# Altium PCB A5.PcbDoc
Units mm, origin at the board's own origin, x right, y up, seen from the top; angles counter-clockwise.
Board outline 80 x 75 mm, 2 copper layers (Top Layer, Bottom Layer); 17 components, 31 nets, 133 pads, 6 vias.
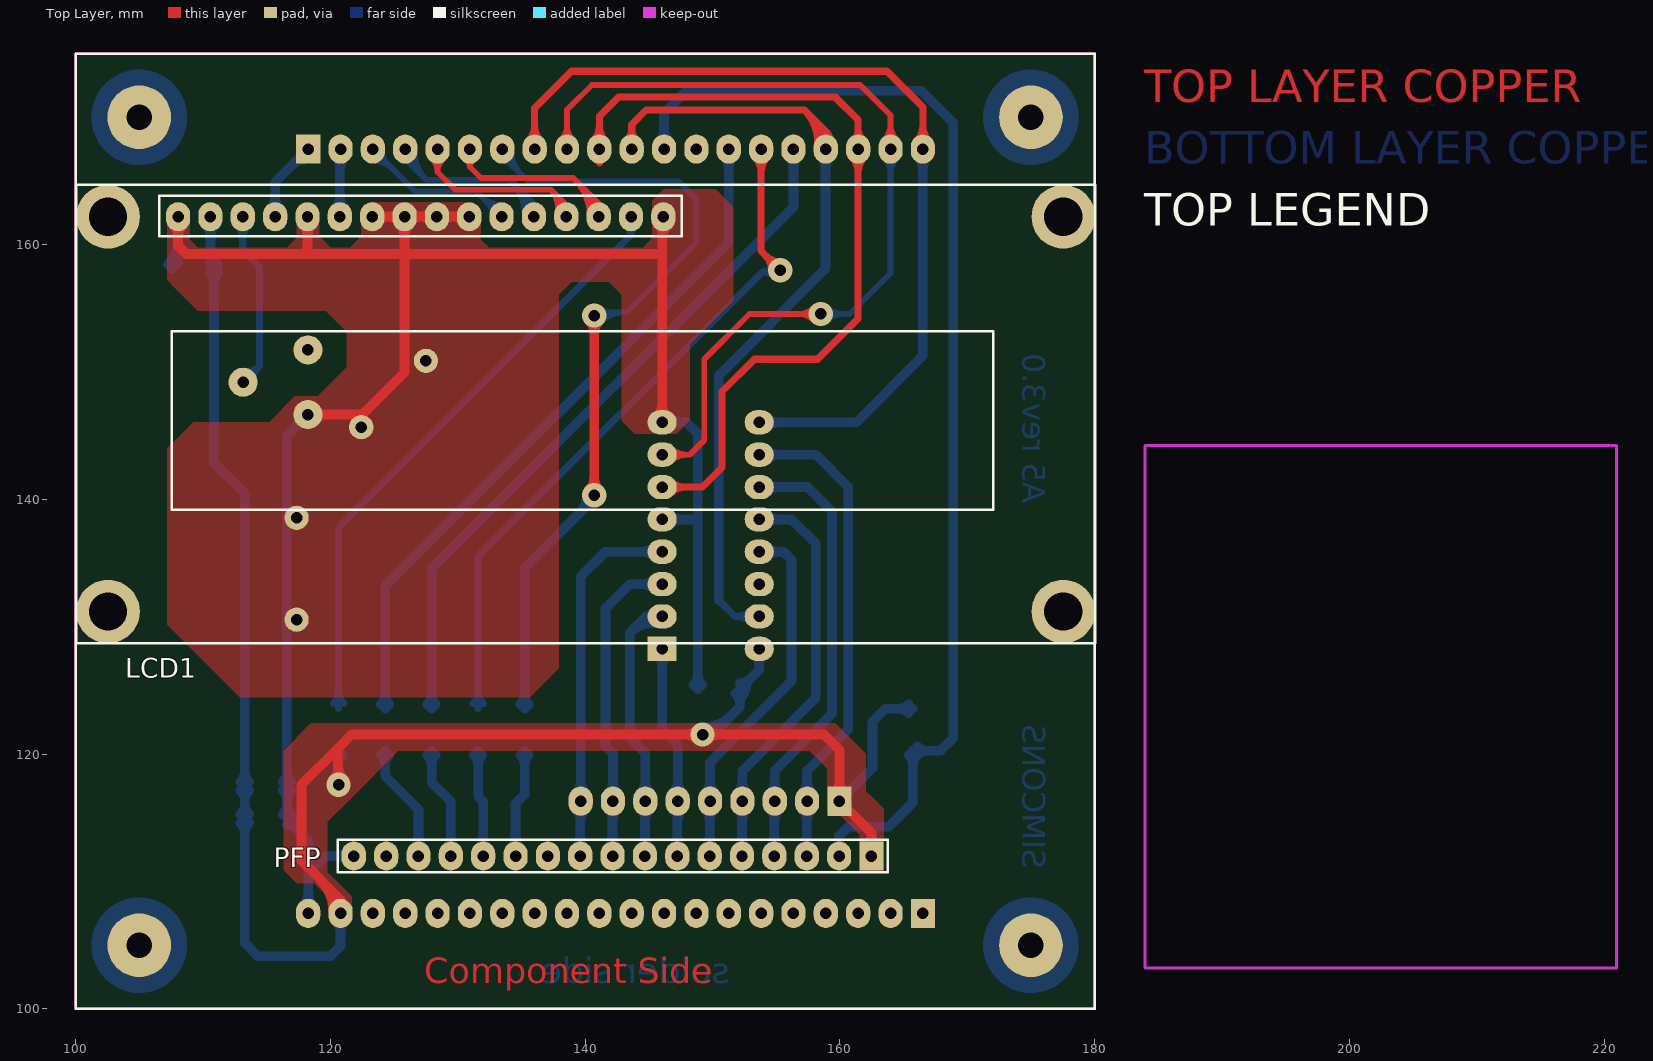
[diagram p0: Top Layer view]
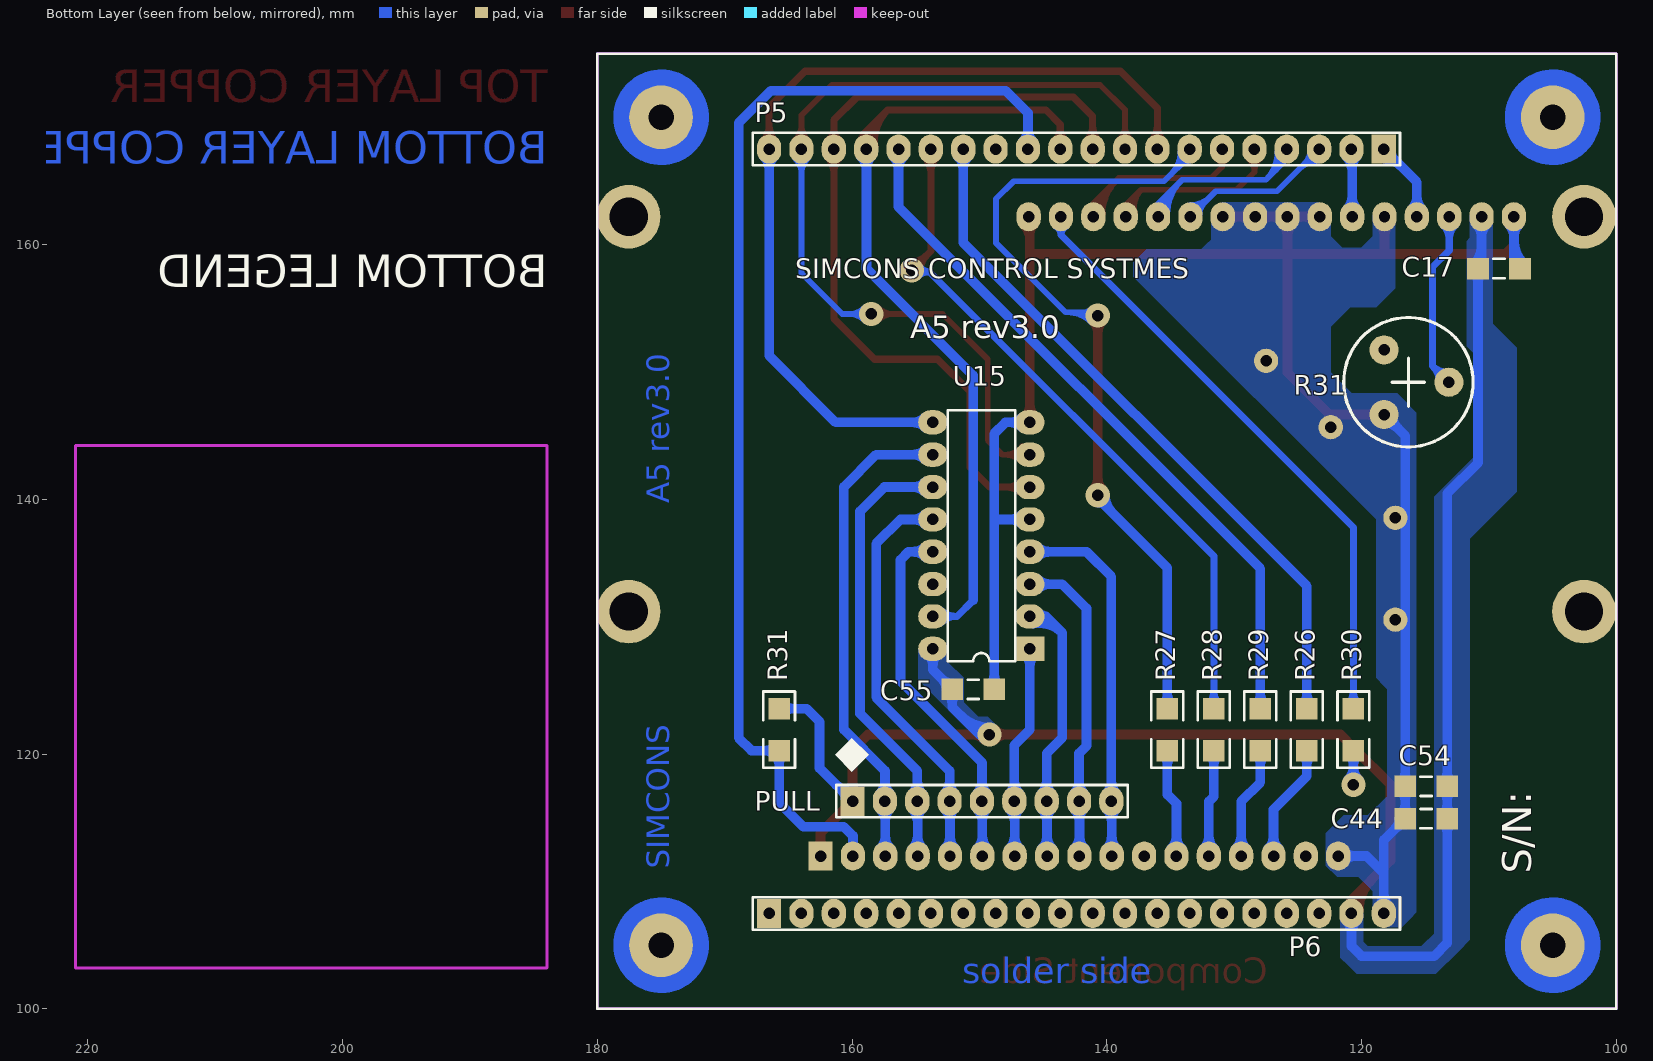
[diagram p1: Bottom Layer view, seen from below]
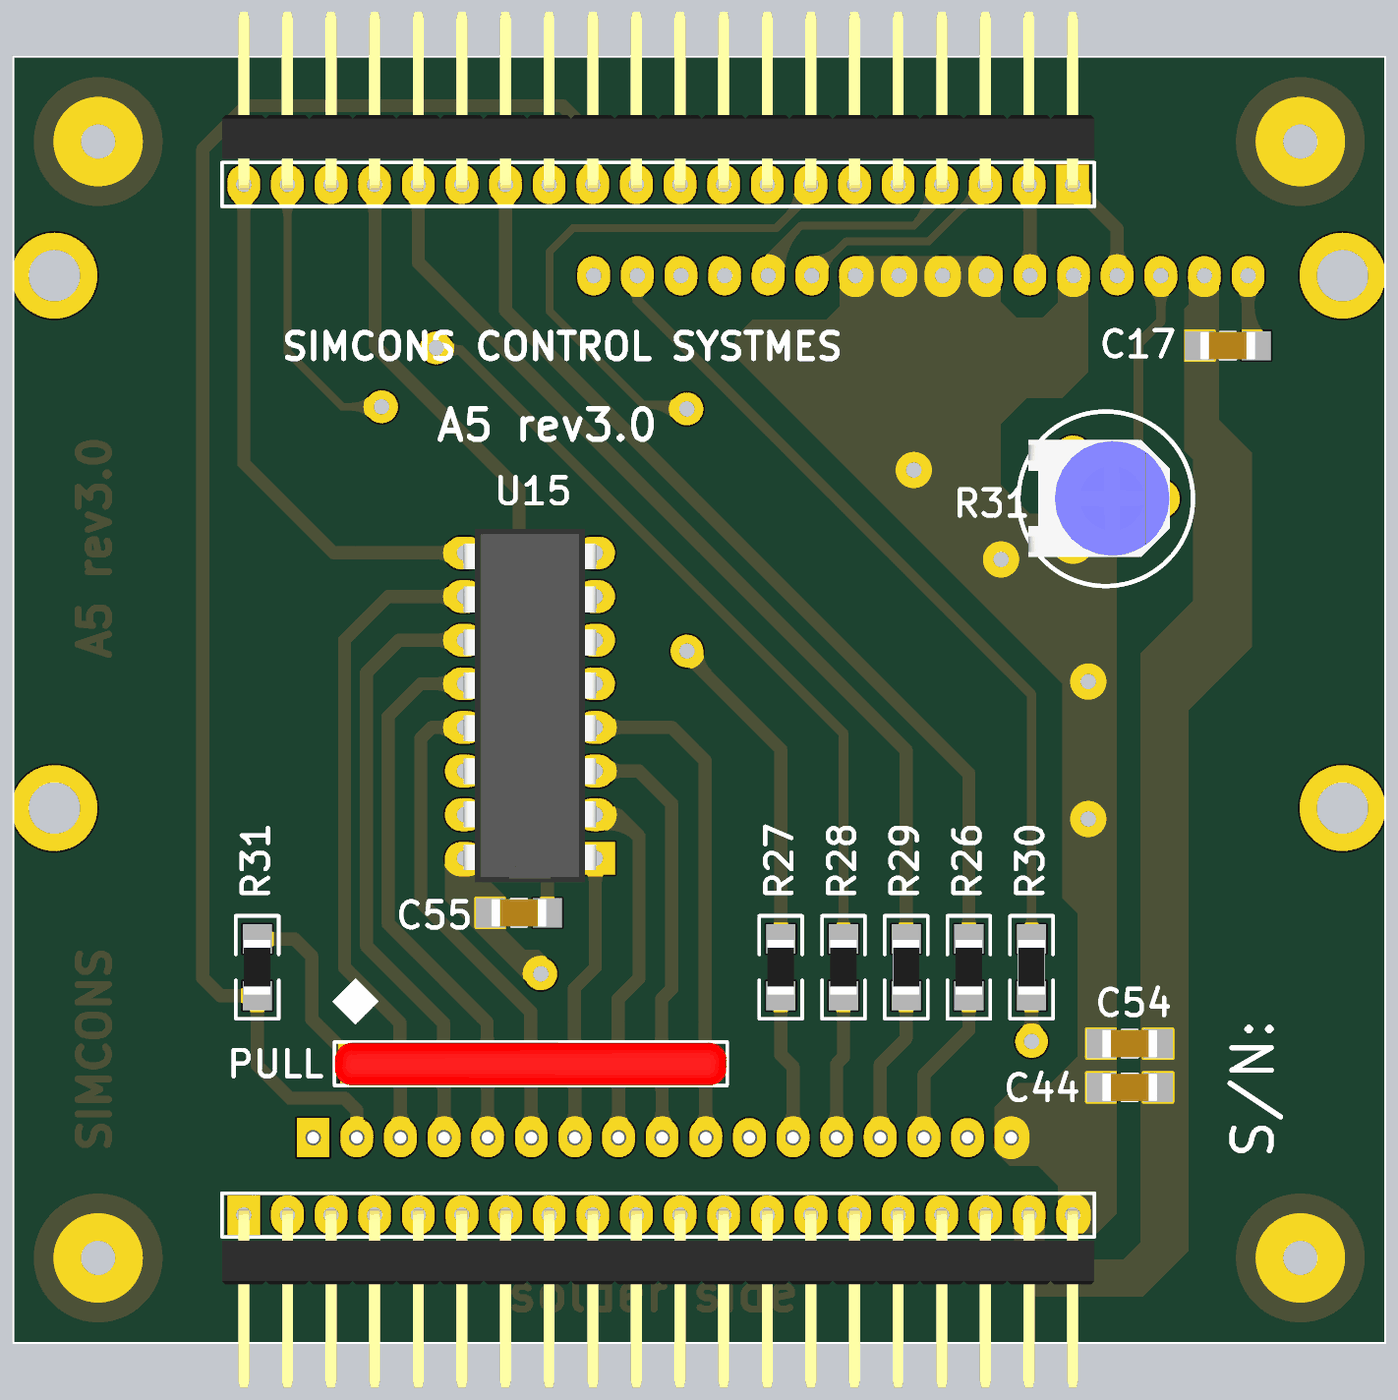
[diagram p2: 3D render of the assembled board from below, using the file's embedded part models]

## Layer stack, top to bottom
Top Layer: signal copper 0.0356
Dielectric: dielectric 0.32, FR-4, Dk 4.8
Bottom Layer: signal copper 0.0356

## Board outline
100,100 180,100 180,175 100,175

## Design rules (kind name [scope] priority, off if disabled: settings)
Clearance [All] p1: gap=0.457
PolygonConnect [All] p1: connectstyle=Direct reliefconductorwidth=0.254 reliefentries=4 polygonreliefangle="90 Angle"
RoutingVias [All] p1: holewidth=0.711 width=1.905 viastyle="Through Hole" minholewidth=0.711 minwidth=1.905 maxholewidth=1.524 maxwidth=1.905
SilkToSilkClearance [All] p1: silktosilkclearance=0
SilkscreenOverComponentPads [All] p1: minsilkscreentomaskgap=0
SolderMaskExpansion [All] p1: expansion=0.102
Width POWER [(InNet('VCC') OR InNet('VCC1') OR InNet('GND'))] p1: maxlimit=0.914 minlimit=0.66 preferedwidth=0.762
Width [All] p2: maxlimit=0.762 minlimit=0.457 preferedwidth=0.559
26 further rules are at their usual default settings.

## Classes and differential pairs
component class SWITCHES: PFP PULL U15
component class KEYBOARD: C17 C44 C54 C55 LCD1 P5 P6 R26 R27 R28 R29 R30 R31

## Components (designator, comment, footprint, x,y, rotation, side; value= is the part's Value field where it differs from the comment)
C17 ".1uF 1206" C1206 109.22,158.115 r0 bottom
C44 ".1uF 1206" C1206 114.935,114.935 r180 bottom
C54 "1uF 1206" C1206 114.935,117.475 r180 bottom
C55 ".1uF 1206" C1206 150.495,125.095 r0 bottom
LCD1 "JHD 162A" 162A 108.046,162.191 r0 top locked
P5 "Header 20" HDR1X20_BURGE_M 118.26,167.5 r0 bottom locked
P6 "Header 20" HDR1X20_BURGE_M 166.52,107.5 r180 bottom locked
PFP "MHDR1X17" HDR1X17_BURGE_F 162.48,112 r180 top locked
PULL "10K RESISTOR NETWORK 8+1PIN" RESPACK8+1 159.969,116.307 r180 bottom
R26 "470E 1206" R1206 120.65,121.92 r270 bottom
R27 "470E 1206" R1206 135.255,121.92 r270 bottom
R28 "470E 1206" R1206 131.604,121.92 r270 bottom
R29 "470E 1206" R1206 127.952,121.92 r270 bottom
R30 "470E 1206" R1206 124.301,121.92 r270 bottom
R31 "470E 1206" R1206 165.735,121.92 r270 bottom
R31 "PRESET 5K" POT 118.237,149.2 r90 bottom
U15 "SN74HC148N" N016D 149.86,137.16 r90 bottom

## Footprints (in the part's own frame and the unit in brackets; to place one, negate y for a bottom-side part, rotate by r counter-clockwise, add the part's x,y. Pads: shape width x height; smd on the part's side, far side on the other; paste and mask are expansions set on the pad)
162A [mm]
  oval 1.905x2.286 hole 0.9: 1(0,0) 2(2.54,0) 3(5.08,0) 4(7.62,0) 5(10.16,0) 6(12.7,0) 7(15.24,0) 8(17.78,0) 9(20.32,0) 10(22.86,0) 11(25.4,0) 12(27.94,0) 13(30.48,0) 14(33.02,0) 15(35.56,0) 16(38.1,0)
  round 5 hole 3: M1(-5.5,0) M2(69.5,0) M3(-5.5,-31) M4(69.5,-31)
  silkscreen extent -8,-33.5 72,2.5, body extent -8.01,-33.5 72,2.5, height 10.16
C1206 [mm] "Chip Capacitor, Body 3.2x1.6mm, IPC High Density"
  rect 1.7x1.7 smd: 1(-1.65,0) 2(1.65,0)
  silkscreen extent -0.44,-0.76 0.44,0.76, body extent -1.6,-0.8 1.6,0.8, height 1
HDR1X17_BURGE_F [mm] "Connector; Header; 17 Position"
  rect 1.905x2.286 hole 0.9: 1(0,0)
  oval 1.905x2.286 hole 0.9: 2(2.54,0) 3(5.08,0) 4(7.62,0) 5(10.16,0) 6(12.7,0) 7(15.24,0) 8(17.78,0) 9(20.32,0) 10(22.86,0) 11(25.4,0) 12(27.94,0) 13(30.48,0) 14(33.02,0) 15(35.56,0) 16(38.1,0) 17(40.64,0)
  silkscreen extent -1.27,-1.27 41.91,1.27, body extent -1.27,-1.27 41.91,1.27, height 6.02
HDR1X20_BURGE_M [mil] "Connector; Header; 20 Position"
  rect 75x90 hole 35.43: 1(0,0)
  oval 75x90 hole 35.43: 2(100,0) 3(200,0) 4(300,0) 5(400,0) 6(500,0) 7(600,0) 8(700,0) 9(800,0) 10(900,0) 11(1000,0) 12(1100,0) 13(1200,0) 14(1300,0) 15(1400,0) 16(1500,0) 17(1600,0) 18(1700,0) 19(1800,0) 20(1900,0)
  silkscreen extent -50,-50 1950,50, body extent -50,-395 1950,13, height 100
N016D [mm] "DIP; 16 Leads; Row Spacing 7.62 mm; Pitch 2.54 mm"
  rect 1.905x2.286 hole 0.9: 1(-8.89,-3.81)
  oval 1.905x2.286 hole 0.9: 2(-6.35,-3.81) 3(-3.81,-3.81) 4(-1.27,-3.81) 5(1.27,-3.81) 6(3.81,-3.81) 7(6.35,-3.81) 8(8.89,-3.81) 9(8.89,3.81) 10(6.35,3.81) 11(3.81,3.81) 12(1.27,3.81) 13(-1.27,3.81) 14(-3.81,3.81) 15(-6.35,3.81) 16(-8.89,3.81)
  silkscreen extent -9.85,-2.65 9.85,2.65, body extent -10.3,-3.88 10.3,3.88, height 4.5
POT [mil] "pot"
  round 90 hole 35.43: 1(-100,0) 2(0,-200) 3(100,0)
  silkscreen extent -200,-275 200,125, body extent -133,-222 135,102, height 300
R1206 [mm] "Chip Capacitor, Body 3.2x1.6mm, IPC High Density"
  rect 1.7x1.7 smd: 1(-1.65,0) 2(1.65,0)
  silkscreen extent -3,-1.25 3,1.25, body extent -1.59,-0.77 1.59,0.77, height 0.63
RESPACK8+1 [mm] "Connector; Header; 9 Position"
  rect 1.905x2.286 hole 0.9: 1(0,0)
  oval 1.905x2.286 hole 0.9: 2(2.54,0) 3(5.08,0) 4(7.62,0) 5(10.16,0) 6(12.7,0) 7(15.24,0) 8(17.78,0) 9(20.32,0)
  silkscreen extent -1.27,-1.27 21.59,1.27, body extent -1.25,-1.27 21.56,1.23, height 5.93

## Part data
C17 C44 C54 C55: library part Cap, "Capacitor"
LCD1: library part 162A, "16 char * 2 line LCD character display with b/light"
P5 P6: "Header, 20-Pin"
PFP: "Header, 17-Pin"
PULL: library part "Header 9", "Header, 9-Pin"
R26 R27 R28 R29 R30 R31: library part Res1, "Resistor"
R31: library part "Res Adj1", "Variable Resistor"
U15: "8-Line to 3-Line Priority Encoder"

## Free pads (board coordinates)
  round 5 hole 2: 0(105,170) 1(175,170) 2(175,105) 3(105,105)
  round 1.905 hole 0.9: 0(117.348,130.556) 1(117.348,138.557) 2(122.428,145.669) 3(127.508,150.876)

## Via types
v1: diameter 1.905, hole 0.9, Top Layer to Bottom Layer, 6 vias

## Nets (pads, with @x,y where several pads share a name; then routed paths per layer and width w, separated by ;. In a path a pad name is that pad's centre, name@x,y a point inside that pad or via, vN(x,y) a via of type N, cw(c..) or ccw(c..) an arc to the next point about the centre after c; other vN are vias at no path point)
AUTO: P5.8 P5.20 U15.9 | length 80
  Top Layer w0.559: P5.8@135.564,168.166 ccw(c134.415,169.316) 136.04,169.316 ccw(c137.665,169.316) P5.8@136.516,168.166 ; P5.8 136.04,170.711 138.938,173.609 163.703,173.609 166.52,170.792 P5.20 ; P5.20@166.044,168.166 ccw(c164.895,169.316) 166.52,169.316 ccw(c168.145,169.316) P5.20@166.996,168.166
  Bottom Layer w0.762: U15.9 161.29,146.05 166.52,151.28 P5.20 ; U15.9@154.265,145.646 cw(c155.24,144.67) 155.24,146.05 cw(c155.24,147.43) U15.9@154.265,146.454 ; P5.20@166.116,166.905 cw(c165.14,165.93) 166.52,165.93 cw(c167.9,165.93) P5.20@166.924,166.905
CDG_IN: PFP.10 PULL.9 U15.4 | length 37.8
  Bottom Layer w0.762: PFP.10@139.216,112.595 ccw(c138.24,113.57) 139.62,113.57 ccw(c141,113.57) PFP.10@140.024,112.595 ; PULL.9@139.245,115.712 cw(c138.34,114.807) 139.62,114.807 ; PULL.9@139.245,116.901 ccw(c138.269,117.877) 139.649,117.877 ccw(c141.029,117.877) PULL.9@140.053,116.901 ; PFP.10 139.62,116.277 PULL.9 139.649,133.934 141.605,135.89 U15.4 ; 139.62,114.666 cw(c141.099,114.666) PULL.9@140.053,115.712 ; U15.4@145.455,135.486 ccw(c144.48,134.51) 144.48,135.89 ccw(c144.48,137.27) U15.4@145.455,136.294
CM_IN: PFP.9 PULL.8 U15.3 | length 33.6
  Bottom Layer w0.762: PFP.9@141.756,112.595 ccw(c140.78,113.57) 142.16,113.57 ccw(c143.54,113.57) PFP.9@142.564,112.595 ; PULL.8@141.785,115.712 cw(c140.88,114.807) 142.16,114.807 ; PULL.8@141.785,116.901 ccw(c140.809,117.877) 142.189,117.877 ccw(c143.569,117.877) PULL.8@142.593,116.901 ; PFP.9 PULL.8@142.16,116.277 ; 142.16,114.666 cw(c143.639,114.666) PULL.8@142.593,115.712 ; PULL.8 142.189,120.066 141.605,120.65 141.605,131.445 143.51,133.35 U15.3 ; U15.3@145.455,132.946 ccw(c144.48,131.97) 144.48,133.35 ccw(c144.48,134.73) U15.3@145.455,133.754
DOWN: P5.9 P5.19 U15.7 | length 87.7
  Top Layer w0.457: P5.9@138.096,168.229 ccw(c137.121,169.314) 138.58,169.314 ccw(c140.039,169.314) P5.9@139.064,168.229 ; P5.9@138.58,167.109 P5.9 138.58,170.584 140.538,172.542 161.595,172.542 163.98,170.157 P5.19 ; U15.7@146.685,144.145 U15.7 148.209,143.51 149.352,144.653 149.352,151.003 152.908,154.559 v1(158.496,154.559) ; U15.7@146.752,142.998 cw(c147.988,141.762) 147.988,143.51 cw(c147.988,145.258) U15.7@146.752,144.022 ; v1@157.984,154.047 ccw(c156.748,152.811) 156.748,154.559 ccw(c156.748,156.307) v1@157.984,155.071 ; P5.19@163.468,168.202 ccw(c162.232,169.438) 163.98,169.438 ccw(c165.728,169.438) P5.19@164.492,168.202
  Bottom Layer w0.457: v1(158.496,154.559) 160.782,154.559 163.98,157.757 P5.19 ; v1@159.008,154.047 cw(c160.244,152.811) 160.244,154.559 cw(c160.244,156.307) v1@159.008,155.071 ; P5.19@163.468,166.798 cw(c162.232,165.562) 163.98,165.562 cw(c165.728,165.562) P5.19@164.492,166.798
DOWN_IN: PFP.5 PULL.4 U15.12 | length 40.8
  Bottom Layer w0.762: PFP.5@151.916,112.595 ccw(c150.94,113.57) 152.32,113.57 ccw(c153.7,113.57) PFP.5@152.724,112.595 ; PULL.4@151.945,115.712 cw(c151.04,114.807) 152.32,114.807 ; PULL.4@151.945,116.901 ccw(c150.969,117.877) 152.349,117.877 ccw(c153.729,117.877) PULL.4@152.753,116.901 ; PFP.5 152.32,116.277 PULL.4 152.349,118.694 158.115,124.46 158.115,136.525 156.21,138.43 U15.12 ; 152.32,114.666 cw(c153.799,114.666) PULL.4@152.753,115.712 ; U15.12@154.265,138.026 cw(c155.24,137.05) 155.24,138.43 cw(c155.24,139.81) U15.12@154.265,138.834
FAULTIND: P5.7 R27.1 | length 80.7
  Top Layer w0.762: v1@140.312,140.739 ccw(c139.336,141.715) 140.716,141.715 ccw(c142.096,141.715) v1@141.12,140.739 ; v1@140.312,154.028 cw(c139.336,153.052) 140.716,153.052 cw(c142.096,153.052) v1@141.12,154.028 ; v1@140.589,154.686 140.716,154.813 v1(140.716,154.432) v1(140.716,140.335)
  Bottom Layer w0.457: P5.7@133.5,166.586 cw(c133.5,165.629) 134.177,166.305 ; P5.7 133.5,166.982 135.509,164.973 147.32,164.973 148.717,163.576 148.717,160.147 143.256,154.686 v1@140.589,154.686 ; P5.7@133.767,167.309 ccw(c135.201,167.309) 134.187,166.295 ; P5.7@134.224,167.309 ccw(c136.762,167.309) 134.967,165.515 ; v1@140.905,154.243 cw(c141.973,153.175) 141.973,154.686 ; v1@141.228,153.92 cw(c143.077,152.071) 143.077,154.686 ; v1@141.228,154.944 ccw(c141.85,155.566) 141.85,154.686
  Bottom Layer w0.762: R27.1@134.923,123.902 ccw(c134.123,124.702) 135.255,124.702 ccw(c136.387,124.702) R27.1@135.587,123.902 ; R27.1 135.255,134.62 140.716,140.081 v1(140.716,140.335) ; 139.561,138.926 ccw(c138.152,140.335) v1@140.144,140.335 ; 140.174,139.539 cw(c140.716,138.997) v1@140.716,139.763
FAULTIND_P: PFP.12 R27.2 | length 12.5
  Bottom Layer w0.762: PFP.12@134.136,112.595 ccw(c133.16,113.57) 134.54,113.57 ccw(c135.92,113.57) PFP.12@134.944,112.595 ; PFP.12 134.54,116.125 135.255,116.84 R27.2 ; R27.2@134.923,119.938 cw(c134.123,119.138) 135.255,119.138 cw(c136.387,119.138) R27.2@135.587,119.938
GCONTACT: P5.15 R28.1 | length 64.3
  Top Layer w0.559: P5.15@153.344,166.834 cw(c152.195,165.684) 153.82,165.684 cw(c155.445,165.684) P5.15@154.296,166.834 ; P5.15 153.82,159.489 v1(155.321,157.988) ; v1@154.648,157.988 ccw(c153.023,157.988) 154.172,159.137 ccw(c155.321,160.286) v1@155.321,158.661
  Bottom Layer w0.559: R28.1@131.2,123.973 ccw(c130.226,124.948) 131.604,124.948 ccw(c132.981,124.948) R28.1@132.007,123.973 ; R28.1 131.604,135.541 153.924,157.861 ; 154.003,157.861 cw(c154.003,156.67) v1@154.845,157.512 ; v1@154.74,158.329 cw(c153.924,158.807) 153.924,157.861 ; v1(155.321,157.988) 155.194,157.861 153.924,157.861
GCONTACT_P: PFP.13 R28.2 | length 12.4
  Bottom Layer w0.762: R28.2@131.272,119.938 cw(c130.471,119.138) 131.604,119.138 cw(c132.736,119.138) R28.2@131.935,119.938 ; PFP.13@131.596,112.595 ccw(c130.62,113.57) 132,113.57 ccw(c133.38,113.57) PFP.13@132.404,112.595 ; R28.2 131.604,116.681 132,116.285 PFP.13
GND: C17.1 C44.1 C54.1 C55.1 LCD1.1 LCD1.5 LCD1.7 LCD1.8 LCD1.9 LCD1.10 LCD1.16 P6.20 pad.0@117.348,130.556 pad.1@117.348,138.557 pad.2@122.428,145.669 pad.3@127.508,150.876 PFP.17 R31.1@118.237,146.66 U15.5 U15.8 | length 214
  Top Layer w0.762: LCD1.1@107.642,161.596 cw(c106.666,160.621) 108.046,160.621 cw(c109.426,160.621) LCD1.1@108.45,161.596 ; LCD1.1 108.046,159.924 108.712,159.258 118.237,159.258 ; LCD1.5@117.802,161.596 cw(c116.826,160.621) 118.206,160.621 cw(c119.586,160.621) LCD1.5@118.61,161.596 ; LCD1.5 118.206,159.289 118.237,159.258 ; R31.1@118.237,146.66 122.53,146.66 125.826,149.956 125.826,159.258 ; R31.1@118.686,146.211 cw(c119.77,145.127) 119.77,146.66 cw(c119.77,148.193) R31.1@118.686,147.109 ; LCD1.7 LCD1.8 ; LCD1.7@123.69,161.787 cw(c124.666,160.811) 124.666,162.191 cw(c124.666,163.571) LCD1.7@123.69,162.595 ; LCD1.8@125.422,161.596 cw(c124.446,160.621) 125.826,160.621 cw(c127.206,160.621) LCD1.8@126.23,161.596 ; LCD1.8@125.422,161.787 ccw(c124.446,160.811) 124.446,162.191 ccw(c124.446,163.571) LCD1.8@125.422,162.595 ; LCD1.8@126.23,161.787 cw(c127.206,160.811) 127.206,162.191 cw(c127.206,163.571) LCD1.8@126.23,162.595 ; LCD1.9@127.962,161.787 ccw(c126.986,160.811) 126.986,162.191 ccw(c126.986,163.571) LCD1.9@127.962,162.595 ; LCD1.9@128.77,161.787 cw(c129.746,160.811) 129.746,162.191 cw(c129.746,163.571) LCD1.9@128.77,162.595 ; LCD1.10@130.502,161.787 ccw(c129.526,160.811) 129.526,162.191 ccw(c129.526,163.571) LCD1.10@130.502,162.595 ; LCD1.10 LCD1.9 LCD1.8 ; U15.8@145.646,146.454 ccw(c144.67,147.43) 146.05,147.43 ccw(c147.43,147.43) U15.8@146.454,146.454 ; LCD1.16@145.742,161.596 cw(c144.998,160.853) 146.05,160.853 ; U15.8 146.05,159.258 ; 146.05,160.389 cw(c147.758,160.389) LCD1.16@146.55,161.596 ; LCD1.16 146.05,162.095 146.05,159.258 ; 118.237,159.258 125.826,159.258 ; 125.826,159.258 146.05,159.258 ; 125.826,159.258 LCD1.8
  Bottom Layer w0.762: C17.1@107.238,158.447 ccw(c105.289,160.396) 108.046,160.396 ; C17.1 108.046,158.591 LCD1.1 ; LCD1.1@107.642,161.596 cw(c106.666,160.621) 108.046,160.621 cw(c109.426,160.621) LCD1.1@108.45,161.596 ; C44.1@116.253,115.267 ccw(c115.453,116.067) 116.585,116.067 ccw(c117.717,116.067) C44.1@116.917,115.267 ; C54.1@116.253,117.143 cw(c115.453,116.343) 116.585,116.343 cw(c117.717,116.343) C54.1@116.917,117.143 ; C54.1@116.253,117.807 ccw(c115.453,118.607) 116.585,118.607 ccw(c117.717,118.607) C54.1@116.917,117.807 ; C44.1@116.585,114.466 cw(c116.585,113.334) 117.386,114.134 cw(c118.186,114.935) C44.1@117.054,114.935 ; R31.1@117.602,146.66 cw(c116.069,146.66) 117.153,145.576 cw(c118.237,144.492) R31.1@118.237,146.025 ; P6.20@117.856,108.095 ccw(c116.88,109.07) 118.26,109.07 ccw(c119.64,109.07) P6.20@118.664,108.095 ; R31.1@118.237,146.66 116.585,145.008 C54.1 C44.1 118.26,113.26 118.26,110.64 ; P6.20 118.26,110.64 ; PFP.17@121.436,111.596 ccw(c120.46,110.62) 120.46,112 ccw(c120.46,113.38) PFP.17@121.436,112.404 ; PFP.17 119.62,112 118.26,110.64 ; U15.5 148.845,138.43 ; U15.8 147.955,146.05 148.845,145.16 148.845,138.43 ; U15.5@146.645,138.026 cw(c147.62,137.05) 147.62,138.43 cw(c147.62,139.81) U15.5@146.645,138.834 ; U15.8@146.645,145.646 cw(c147.62,144.67) 147.62,146.05 cw(c147.62,147.43) U15.8@146.645,146.454 ; C55.1@148.513,125.427 ccw(c147.713,126.227) 148.845,126.227 ccw(c149.977,126.227) C55.1@149.177,125.427 ; C55.1 148.845,138.43
LCD_DB#4: LCD1.11 P5.3 | length 19.5
  Bottom Layer w0.457: P5.3@123.34,166.586 cw(c123.34,164.378) 124.901,165.939 ; P5.3@123.34,167.043 cw(c123.34,165.939) 124.121,166.72 ; P5.3 126.654,164.186 131.451,164.186 LCD1.11 ; P5.3@124.064,167.309 ccw(c125.352,167.309) 124.441,166.399 ; 131.885,163.752 ccw(c133.446,165.313) LCD1.11@133.446,163.105 ; 132.345,163.292 cw(c131.434,162.381) LCD1.11@132.722,162.381 ; 132.666,162.971 ccw(c133.446,163.752) LCD1.11@133.446,162.648
LCD_DB#5: LCD1.12 P5.4 | length 23.6
  Bottom Layer w0.457: P5.4 125.88,166.728 127.508,165.1 ; P5.4@126.147,167.308 ccw(c128.156,167.293) 126.735,165.873 ; P5.4@126.604,167.304 ccw(c129.69,167.283) 127.508,165.1 ; 134.169,165.019 cw(c131.532,162.381) LCD1.12@135.262,162.381 ; 134.95,164.239 cw(c133.093,162.381) LCD1.12@135.719,162.381 ; 135.73,163.458 cw(c134.654,162.381) LCD1.12@136.177,162.381 ; LCD1.12 135.986,163.203 134.089,165.1 127.508,165.1
LCD_DB#6: LCD1.13 P5.5 | length 19.6
  Top Layer w0.457: P5.5@127.943,166.765 cw(c127.019,165.712) 128.42,165.712 ; P5.5 128.42,165.712 ; P5.5@128.897,166.765 ccw(c129.821,165.712) 128.42,165.712 ; LCD1.13@137.821,162.544 ccw(c135.969,162.969) 137.312,164.313 ; 137.896,163.729 cw(c136.919,162.751) LCD1.13@138.266,162.441 ; LCD1.13 138.526,163.099 137.312,164.313 ; 128.42,165.712 129.819,164.313 137.312,164.313
LCD_DB#7: LCD1.14 P5.6 | length 21.5
  Top Layer w0.457: P5.6@130.615,166.673 cw(c130.3,166.093) 130.96,166.093 ; P5.6 130.96,166.093 ; P5.6@131.305,166.673 ccw(c131.62,166.093) 130.96,166.093 ; 139.233,165.059 cw(c136.556,162.381) LCD1.14@140.342,162.381 ; 140.014,164.278 cw(c138.117,162.381) LCD1.14@140.799,162.381 ; 140.794,163.498 cw(c139.678,162.381) LCD1.14@141.257,162.381 ; LCD1.14 141.066,163.226 139.065,165.227 131.826,165.227 130.96,166.093
LCD_E#: LCD1.6 P5.2 | length 9.7
  Bottom Layer w0.762: LCD1.6@120.342,162.786 ccw(c119.366,163.761) 120.746,163.761 ccw(c122.126,163.761) LCD1.6@121.15,162.786 ; P5.2@120.396,166.905 cw(c119.551,166.06) 120.746,166.06 ; LCD1.6 120.746,167.446 P5.2 ; 120.746,165.799 cw(c122.31,165.799) P5.2@121.204,166.905
LCD_RS#: LCD1.4 P5.1 | length 10.7
  Bottom Layer w0.762: LCD1.4@115.262,162.786 ccw(c114.286,163.761) 115.666,163.761 ccw(c117.046,163.761) LCD1.4@116.07,162.786 ; LCD1.4 115.666,164.906 P5.1 ; 116.959,166.199 cw(c118.26,164.898) P5.1@118.26,166.738 ; P5.1@117.419,166.659 ccw(c116.769,167.309) P5.1@117.689,167.309
M_IN: PFP.6 PULL.5 U15.13 | length 37.3
  Bottom Layer w0.762: PFP.6@149.376,112.595 ccw(c148.4,113.57) 149.78,113.57 ccw(c151.16,113.57) PFP.6@150.184,112.595 ; PULL.5@149.405,115.712 cw(c148.5,114.807) 149.78,114.807 ; PULL.5@149.405,116.901 ccw(c148.429,117.877) 149.809,117.877 ccw(c151.189,117.877) PULL.5@150.213,116.901 ; PFP.6 PULL.5@149.78,116.277 ; 149.78,114.666 cw(c151.259,114.666) PULL.5@150.213,115.712 ; PULL.5 149.809,119.329 156.21,125.73 156.21,135.255 155.575,135.89 U15.13 ; U15.13@154.265,135.486 cw(c155.24,134.51) 155.24,135.89 cw(c155.24,137.27) U15.13@154.265,136.294
MANUAL_P: PFP.15 R30.2 | length 13.3
  Bottom Layer w0.762: R30.2@123.97,119.938 cw(c123.169,119.138) 124.301,119.138 cw(c125.434,119.138) R30.2@124.633,119.938 ; R30.2 124.301,118.269 126.92,115.65 PFP.15 ; PFP.15@126.516,112.595 ccw(c125.54,113.57) 126.92,113.57 ccw(c128.3,113.57) PFP.15@127.324,112.595
MANUAL_R: P5.14 R30.1 | length 59.1
  Bottom Layer w0.762: R30.1@123.97,123.902 ccw(c123.169,124.702) 124.301,124.702 ccw(c125.434,124.702) R30.1@124.633,123.902 ; R30.1 124.301,133.191 151.28,160.17 P5.14 ; P5.14@150.876,166.905 cw(c149.9,165.93) 151.28,165.93 cw(c152.66,165.93) P5.14@151.684,166.905
MCONTACT: P5.16 R29.1 | length 59.6
  Bottom Layer w0.762: R29.1@127.621,123.902 ccw(c126.82,124.702) 127.953,124.702 ccw(c129.085,124.702) R29.1@128.284,123.902 ; R29.1 127.953,134.556 156.36,162.964 P5.16 ; P5.16@155.956,166.905 cw(c154.98,165.93) 156.36,165.93 cw(c157.74,165.93) P5.16@156.764,166.905
MCONTACT_P: PFP.14 R29.2 | length 12.8
  Bottom Layer w0.762: R29.2@127.621,119.938 cw(c126.82,119.138) 127.953,119.138 cw(c129.085,119.138) R29.2@128.284,119.938 ; R29.2 127.953,117.792 129.46,116.285 PFP.14 ; PFP.14@129.056,112.595 ccw(c128.08,113.57) 129.46,113.57 ccw(c130.84,113.57) PFP.14@129.864,112.595
MENU: P5.11 P5.17 U15.15 | length 77.1
  Top Layer w0.559: P5.11@143.249,168.223 ccw(c142.603,169.06) 143.66,169.06 ccw(c144.717,169.06) P5.11@144.071,168.223 ; P5.11 143.66,169.441 144.78,170.561 157.226,170.561 ; 158.062,169.725 cw(c156.284,167.947) P5.17@158.786,167.702 ; P5.17@158.23,167.756 ccw(c154.762,168.097) 157.226,170.561 ; P5.17@158.551,168.266 ccw(c158.173,168.887) 158.9,168.887 ; 158.898,168.889 cw(c157.806,167.798) P5.17@159.342,167.647 ; P5.17 158.9,168.887 ; P5.17@159.25,168.266 cw(c159.627,168.887) 158.9,168.887 ; 157.226,170.561 158.9,168.887
  Bottom Layer w0.559: 150.495,132.08 151.765,130.81 U15.15 ; U15.15@153.004,130.334 ccw(c151.854,129.185) 151.854,130.81 ccw(c151.854,132.435) U15.15@153.004,131.286
  Bottom Layer w0.762: 150.495,132.08 150.495,149.733 158.877,158.115 158.877,167.477 P5.17 ; P5.17@158.496,166.905 cw(c157.576,165.985) 158.877,165.985 ; 158.877,165.874 cw(c160.335,165.874) P5.17@159.304,166.905
NetLCD1_3: LCD1.3 R31.2@113.157,149.2 | length 19.4
  Bottom Layer w0.559: LCD1.3@112.65,161.525 cw(c111.501,160.375) 113.126,160.375 cw(c114.751,160.375) LCD1.3@113.602,161.525 ; LCD1.3 113.126,159.543 114.427,158.242 114.427,150.47 R31.2@113.157,149.2 ; R31.2@113.157,149.936 ccw(c113.157,151.715) 114.414,150.457 ccw(c115.672,149.2) R31.2@113.894,149.2
NetLCD1_15: LCD1.15 R26.1 | length 51.9
  Bottom Layer w0.559: R26.1@120.247,123.973 ccw(c119.272,124.948) 120.65,124.948 ccw(c122.028,124.948) R26.1@121.053,123.973 ; R26.1 120.65,137.795 143.606,160.751 ; LCD1.15@143.236,161.438 cw(c142.783,160.751) 143.606,160.751 ; LCD1.15 143.606,160.751 ; LCD1.15@143.976,161.438 ccw(c144.429,160.751) 143.606,160.751
RESET: P5.12 PFP.2 R31.2@165.735,120.27 | length 97.4
  Bottom Layer w0.762: P5.12@145.796,168.095 ccw(c144.82,169.07) 146.2,169.07 ccw(c147.58,169.07) P5.12@146.604,168.095 ; P5.12 146.2,170.33 147.955,172.085 166.37,172.085 168.91,169.545 168.91,121.285 167.895,120.27 165.735,120.27 165.735,116.205 163.83,114.3 160.655,114.3 159.94,113.585 PFP.2 ; R31.2@165.403,119.938 cw(c164.603,119.138) 165.735,119.138 cw(c166.867,119.138) 166.067,119.938 cw(c166.867,119.138) 166.867,120.27 cw(c166.867,121.402) R31.2@166.067,120.602
SET_IN: PFP.3 PULL.2 U15.10 | length 47
  Bottom Layer w0.762: U15.10 158.115,143.51 160.655,140.97 160.655,121.92 157.429,118.694 PULL.2 157.4,116.277 PFP.3 ; U15.10@154.265,143.106 cw(c155.24,142.13) 155.24,143.51 cw(c155.24,144.89) U15.10@154.265,143.914 ; PFP.3@156.996,112.595 ccw(c156.02,113.57) 157.4,113.57 ccw(c158.78,113.57) PFP.3@157.804,112.595 ; PULL.2@157.025,115.712 cw(c156.12,114.807) 157.4,114.807 ; PULL.2@157.025,116.901 ccw(c156.049,117.877) 157.429,117.877 ccw(c158.809,117.877) PULL.2@157.833,116.901 ; 157.4,114.666 cw(c158.879,114.666) PULL.2@157.833,115.712
START_IN: PFP.7 PULL.6 U15.1 | length 25.4
  Bottom Layer w0.762: U15.1@145.646,127.866 cw(c144.67,126.89) 146.05,126.89 cw(c147.43,126.89) U15.1@146.454,127.866 ; U15.1 146.05,121.92 147.269,120.701 PULL.6 ; PFP.7@146.836,112.595 ccw(c145.86,113.57) 147.24,113.57 ccw(c148.62,113.57) PFP.7@147.644,112.595 ; PULL.6@146.865,115.712 cw(c145.96,114.807) 147.24,114.807 ; PULL.6@146.865,116.901 ccw(c145.889,117.877) 147.269,117.877 ccw(c148.649,117.877) PULL.6@147.673,116.901 ; PFP.7 PULL.6@147.24,116.277 ; 147.24,114.666 cw(c148.719,114.666) PULL.6@147.673,115.712
STOP_IN: PFP.8 PULL.7 U15.2 | length 33
  Bottom Layer w0.762: PFP.8@144.296,112.595 ccw(c143.32,113.57) 144.7,113.57 ccw(c146.08,113.57) PFP.8@145.104,112.595 ; PULL.7@144.325,115.712 cw(c143.42,114.807) 144.7,114.807 ; PULL.7@144.325,116.901 ccw(c143.349,117.877) 144.729,117.877 ccw(c146.109,117.877) PULL.7@145.133,116.901 ; 144.543,130.573 cw(c145.625,129.491) U15.2@145.893,130.998 ; PFP.8 144.7,116.277 PULL.7 144.729,120.066 143.51,121.285 143.51,129.54 ; 144.7,114.666 cw(c146.179,114.666) PULL.7@145.133,115.712 ; U15.2@145.387,130.489 ccw(c144.78,130.076) 144.78,130.81 ; U15.2@145.387,131.131 cw(c144.78,131.544) 144.78,130.81 ; U15.2@145.759,130.247 ccw(c145.313,127.737) 143.51,129.54 ; U15.2 144.78,130.81 ; 143.51,129.54 144.78,130.81
UP: P5.10 P5.18 U15.6 | length 75.9
  Top Layer w0.457: P5.10@140.919,166.614 cw(c140.842,166.347) 141.12,166.347 ; P5.10 141.12,166.347 ; P5.10@141.321,166.614 ccw(c141.398,166.347) 141.12,166.347
  Top Layer w0.559: P5.10@140.644,168.167 ccw(c139.499,169.314) 141.12,169.314 ccw(c142.741,169.314) P5.10@141.596,168.167 ; P5.10 141.12,170.076 142.621,171.577 159.639,171.577 161.44,169.776 P5.18 161.44,154.201 158.242,151.003 153.289,151.003 150.749,148.463 150.749,142.494 149.225,140.97 U15.6 ; U15.6@146.716,140.494 cw(c147.866,139.345) 147.866,140.97 cw(c147.866,142.595) U15.6@146.716,141.446 ; P5.18@160.964,166.834 cw(c159.815,165.684) 161.44,165.684 cw(c163.065,165.684) P5.18@161.916,166.834 ; P5.18@161.044,168.234 ccw(c160.476,169.014) 161.44,169.014 ccw(c162.404,169.014) P5.18@161.836,168.234
  Top Layer w0.762: U15.6 U15.6@146.304,141.224
UPIN: PFP.4 PULL.3 U15.11 | length 44.1
  Bottom Layer w0.762: U15.11 157.48,140.97 159.385,139.065 159.385,123.19 154.889,118.694 PULL.3 154.86,116.277 PFP.4 ; U15.11@154.265,140.566 cw(c155.24,139.59) 155.24,140.97 cw(c155.24,142.35) U15.11@154.265,141.374 ; PFP.4@154.456,112.595 ccw(c153.48,113.57) 154.86,113.57 ccw(c156.24,113.57) PFP.4@155.264,112.595 ; PULL.3@154.485,115.712 cw(c153.58,114.807) 154.86,114.807 ; PULL.3@154.485,116.901 ccw(c153.509,117.877) 154.889,117.877 ccw(c156.269,117.877) PULL.3@155.293,116.901 ; 154.86,114.666 cw(c156.339,114.666) PULL.3@155.293,115.712
VCC: C17.2 C44.2 C54.2 C55.2 LCD1.2 P6.19 PFP.1 PULL.1 R26.2 R31.1@165.735,123.57 U15.16 | length 204.4
  Top Layer w0.762: 119.208,110.154 cw(c116.745,107.691) P6.19@120.229,107.691 ; v1@120.246,118.006 ccw(c119.424,118.828) 120.587,118.828 ; 120.509,108.853 cw(c119.346,107.691) P6.19@120.991,107.691 ; 120.587,119.135 ccw(c122.183,119.135) v1@121.054,118.006 ; v1(120.65,117.602) 120.587,117.665 120.587,120.459 ; P6.19 120.8,108.562 117.729,111.633 117.729,117.602 120.587,120.459 ; v1@148.821,121.135 ccw(c147.845,120.159) 147.845,121.539 ccw(c147.845,122.919) v1@148.821,121.943 ; v1@149.629,121.135 cw(c150.605,120.159) 150.605,121.539 cw(c150.605,122.919) v1@149.629,121.943 ; PULL.1@159.565,116.901 ccw(c158.589,117.877) 159.969,117.877 ccw(c161.349,117.877) PULL.1@160.373,116.901 ; PFP.1 162.48,113.796 PULL.1 159.969,120.32 158.75,121.539 v1(149.225,121.539) 121.666,121.539 120.587,120.459
  Bottom Layer w0.762: LCD1.2@110.182,161.596 cw(c109.206,160.621) 110.586,160.621 cw(c111.966,160.621) LCD1.2@110.99,161.596 ; C17.2@110.538,157.783 cw(c109.738,156.983) 110.87,156.983 cw(c112.002,156.983) C17.2@111.202,157.783 ; 110.586,159.933 ccw(c112.688,159.933) C17.2@111.202,158.447 ; LCD1.2 110.586,158.399 C17.2 110.87,142.876 113.285,140.461 C54.2 C44.2 113.285,105.155 114.3,104.14 120.015,104.14 120.8,104.925 P6.19 ; C44.2@112.953,114.603 cw(c112.153,113.803) 113.285,113.803 cw(c114.417,113.803) C44.2@113.617,114.603 ; C44.2@112.953,115.267 ccw(c112.153,116.067) 113.285,116.067 ccw(c114.417,116.067) C44.2@113.617,115.267 ; C54.2@112.953,117.143 cw(c112.153,116.343) 113.285,116.343 cw(c114.417,116.343) C54.2@113.617,117.143 ; C54.2@112.953,117.807 ccw(c112.153,118.607) 113.285,118.607 ccw(c114.417,118.607) C54.2@113.617,117.807 ; v1@120.246,118.006 ccw(c119.27,118.982) 120.65,118.982 ccw(c122.03,118.982) v1@121.054,118.006 ; R26.2@120.318,119.938 cw(c119.518,119.138) 120.65,119.138 cw(c121.782,119.138) R26.2@120.982,119.938 ; P6.19@120.396,106.905 cw(c119.42,105.93) 120.8,105.93 cw(c122.18,105.93) P6.19@121.204,106.905 ; v1(120.65,117.602) R26.2 ; v1@149.225,121.349 ccw(c149.225,122.728) 150.201,121.753 ; v1(149.225,121.539) 149.987,121.539 152.145,123.697 C55.2 153.67,126.62 U15.16 ; v1@149.225,122.111 ccw(c149.225,125.33) 151.501,123.053 ; C55.2@151.813,124.763 cw(c151.013,123.963) 152.145,123.963 cw(c153.277,123.963) C55.2@152.477,124.763 ; C55.2@152.145,125.564 ccw(c152.145,126.696) 152.946,125.896 ccw(c153.746,125.095) C55.2@152.614,125.095 ; U15.16@153.266,127.866 cw(c152.29,126.89) 153.67,126.89 cw(c155.05,126.89) U15.16@154.074,127.866 ; PULL.1 162.56,118.897 162.56,122.555 163.575,123.57 R31.1@165.735,123.57 ; PULL.1@159.969,117.069 ccw(c159.969,118.908) 161.27,117.607 ; PULL.1@160.541,116.497 cw(c161.461,116.497) PULL.1@160.81,117.148 ; R31.1@165.403,123.238 ccw(c164.603,122.438) 164.603,123.57 ccw(c164.603,124.702) R31.1@165.403,123.902
pads on no net: LCD1.M1 LCD1.M2 LCD1.M3 LCD1.M4 P5.13 P6.1 P6.2 P6.3 P6.4 P6.5 P6.6 P6.7 P6.8 P6.9 P6.10 P6.11 P6.12 P6.13 P6.14 P6.15 P6.16 P6.17 P6.18 PFP.11 PFP.16 R31.3 U15.14
copper on no net: | length 682.8
  Top Layer w0.203: 100,100 100,175 180,175 180,100 100,100
  Bottom Layer w0.203: 100,100 100,175 180,175 180,100 100,100
  Bottom Layer w2.5: 107.5,105 ccw(c105,105) 107.5,105 ; 107.5,170 ccw(c105,170) 107.5,170 ; 177.5,105 ccw(c175,105) 177.5,105 ; 177.5,170 ccw(c175,170) 177.5,170

## Polygon pours and split planes (outlines as drawn)
GND on Top Layer "Top Layer-No Net" (solid, pour order 11): 135.636,124.46 112.903,124.46 109.093,128.27 107.188,130.175 107.188,136.652 107.188,144.018 109.22,146.05 114.046,146.05 115.189,146.05 117.221,148.082 118.999,148.082 121.285,150.368 121.285,153.162 119.634,154.813 109.601,154.813 107.823,156.591 107.188,157.226 107.188,162.179 108.966,162.179 108.966,160.401 109.347,160.02 109.601,159.766 112.776,159.766 116.586,159.766 117.348,160.528 117.348,162.179 119.126,162.179 119.126,160.655 119.634,160.147 120.015,159.766 120.904,159.766 121.539,159.766 122.428,160.655 122.428,162.179 122.428,162.56 123.19,163.322 127.889,163.322 130.683,163.322 131.826,162.179 131.826,160.401 132.461,159.766 133.35,159.766 144.526,159.766 145.034,160.274 145.288,160.528 145.288,163.449 146.177,164.338 150.241,164.338 151.384,163.195 151.638,162.941 151.638,159.258 151.638,155.575 148.717,152.654 148.209,152.146 148.209,146.177 147.193,145.161 146.05,145.161 143.891,145.161 143.129,145.923 142.875,146.177 142.875,153.162 142.875,156.083 141.859,157.099 138.938,157.099 137.922,156.083 137.922,126.746 135.636,124.46
VCC on Top Layer "Top Layer-No Net" (solid, pour order 7): 119.888,107.442 119.888,108.712 119.507,109.093 118.745,109.855 117.602,109.855 117.348,109.855 116.332,110.871 116.332,120.269 118.364,122.301 118.491,122.428 123.698,122.428 159.639,122.428 160.655,121.412 162.052,120.015 162.052,117.729 162.052,115.824 161.544,115.316 161.417,115.189 159.258,115.189 159.004,115.443 159.004,117.221 159.004,118.872 157.607,120.269 125.349,120.269 121.666,116.586 119.761,114.681 119.761,112.014 119.761,110.744 120.777,109.728 121.666,108.839 121.666,107.188
VCC on Top Layer "Top Layer-No Net" (solid, pour order 10): 161.544,112.903 161.544,113.665 160.528,114.681 160.02,115.189 159.258,115.189 159.258,116.713 159.766,117.221 160.782,118.237 161.925,118.237 161.925,117.221 162.687,116.459 163.449,115.697 163.449,110.871 161.544,110.871
VCC on Bottom Layer "Top Layer-No Net" (solid, pour order 12): 149.86,120.904 154.813,125.857 154.813,128.27 152.527,128.27 152.527,127.254 151.257,125.984 151.257,124.714 151.257,124.079 150.114,122.936 149.352,122.936 148.463,122.047
GND on Bottom Layer "Top Layer-No Net" (solid, pour order 9): 118.237,106.426 116.84,106.426 116.205,107.061 115.697,107.569 115.697,115.189 115.697,146.812 116.713,147.828 117.221,148.336 119.761,148.336 120.777,148.336 122.428,149.987 122.428,153.543 120.904,155.067 118.872,155.067 117.348,156.591 117.348,162.306 119.126,162.306 119.126,160.655 119.761,160.02 120.015,159.766 121.539,159.766 122.428,160.655 122.428,162.306 123.317,163.195 123.317,163.322 125.984,163.322 130.937,163.322 131.191,163.068 131.826,162.433 131.826,162.179 131.826,160.401 132.207,160.02 132.588,159.639 135.509,159.639 136.906,159.639 137.287,159.258 137.922,158.623 137.922,157.48 118.872,138.43 118.872,136.652 118.872,125.984 118.237,125.349 117.983,125.095 117.983,119.38 117.983,116.713 119.507,115.189 121.412,115.189 122.301,114.3 122.809,113.792 122.809,111.887 122.809,111.252 121.92,110.363 120.269,110.363 119.38,109.474 119.126,109.22 119.126,107.315
VCC on Bottom Layer "Top Layer-No Net" (solid, pour order 8): 121.666,107.442 121.666,104.013 121.031,103.378 120.396,102.743 115.062,102.743 114.173,102.743 112.395,104.521 111.506,105.41 111.506,109.982 111.506,136.906 107.823,140.589 107.823,151.892 109.601,153.67 109.728,153.797 109.728,162.306 111.506,162.306 111.506,160.528 111.76,160.274 111.76,157.099 111.76,152.019 111.252,151.511 111.252,143.256 113.03,141.478 113.919,140.589 114.3,140.208 114.3,113.411 114.3,105.918 115.189,105.029 115.316,104.902 118.237,104.902 119.507,104.902 119.888,105.283 119.888,107.315 119.888,107.569

## Keep-outs
Keep-Out Layer:
  lines w0.203: 100,100 100,175 180,175 180,100 100,100
  lines w0.254: 183.967,103.203 183.967,144.224 220.967,144.224 220.967,103.203 183.967,103.203
  text "KEEPOUT LAYER" at 185.166,140.287 h1.78
  text "PCB INFORMATION:" at 185.293,134.612 h1.78
  text "PCB: FR-4" at 185.293,131.143 h1.78
  text "THICKNESS:35MICRONS" at 185.293,127.587 h1.78
  text "LAYERS TO PRINT:" at 185.166,123.777 h1.78
  text "TOP LAYER CU" at 191.008,120.602 h1.52
  text "BOTTOM LAYER CU" at 191.008,117.579 h1.52
  text "TOP SOLDER" at 191.008,114.557 h1.52
  text "BOTTOM SOLDER" at 191.008,111.534 h1.52
  text "TOP LEGEND" at 191.008,108.512 h1.52
  text "BOTTOM LEGEND" at 191.008,105.489 h1.52
  text "MOUNTING HOLE SIZE IS 2MM DIA" at 184.277,99.774 h1.78

## Other copper
Top Layer:
  text "TOP LAYER COPPER" at 183.896,171.196 h2.54
  text "Component Side" at 127.365,102 h2
Bottom Layer:
  text "BOTTOM LAYER COPPER" at 183.896,166.345 h2.54
  text "A5 rev3.0" at 174.371,139.7 h1.78 r270
  text "SIMCONS" at 174.371,110.998 h1.78 r270
  text "solder side" at 151.365,102 h2

## Silkscreen, mask and mechanical layers (free items; w line width, h text height)
Top Overlay:
  lines w0.203: 100,100 100,175 180,175 180,100 100,100 ; 106.553,160.655 106.553,163.83 147.574,163.83 147.574,160.655 142.24,160.655 106.553,160.655
  text "TOP LEGEND" at 183.896,161.493 h2.54
Bottom Overlay:
  region: 160.02,118.591 161.367,119.938 160.02,121.285 158.673,119.938
  lines w0.203: 100,100 100,175 180,175 180,100 100,100
  text "SIMCONS CONTROL SYSTMES" at 164.465,157.353 h1.52
  text "BOTTOM LEGEND" at 183.896,156.642 h2.54
  text "A5 rev3.0" at 155.448,152.654 h1.78
  text "S/N:" at 106.68,110.617 h2.29 r270
Top Solder:
  the board outline again, w0.203
  text "TOP SOLDER" at 183.896,151.79 h2.54
Bottom Solder:
  the board outline again, w0.203
  text "BOTTOM SOLDER" at 183.896,146.939 h2.54